# Altium PCB PCB2.PcbDoc
Units mm, origin at the board's own origin, x right, y up, seen from the top; angles counter-clockwise.
Board outline 87 x 60 mm, 4 copper layers (Top Layer, Internal Plane 1, Internal Plane 2, Bottom Layer), stack 0.462 mm thick; 43 components, 44 nets, 197 pads, 39 vias.
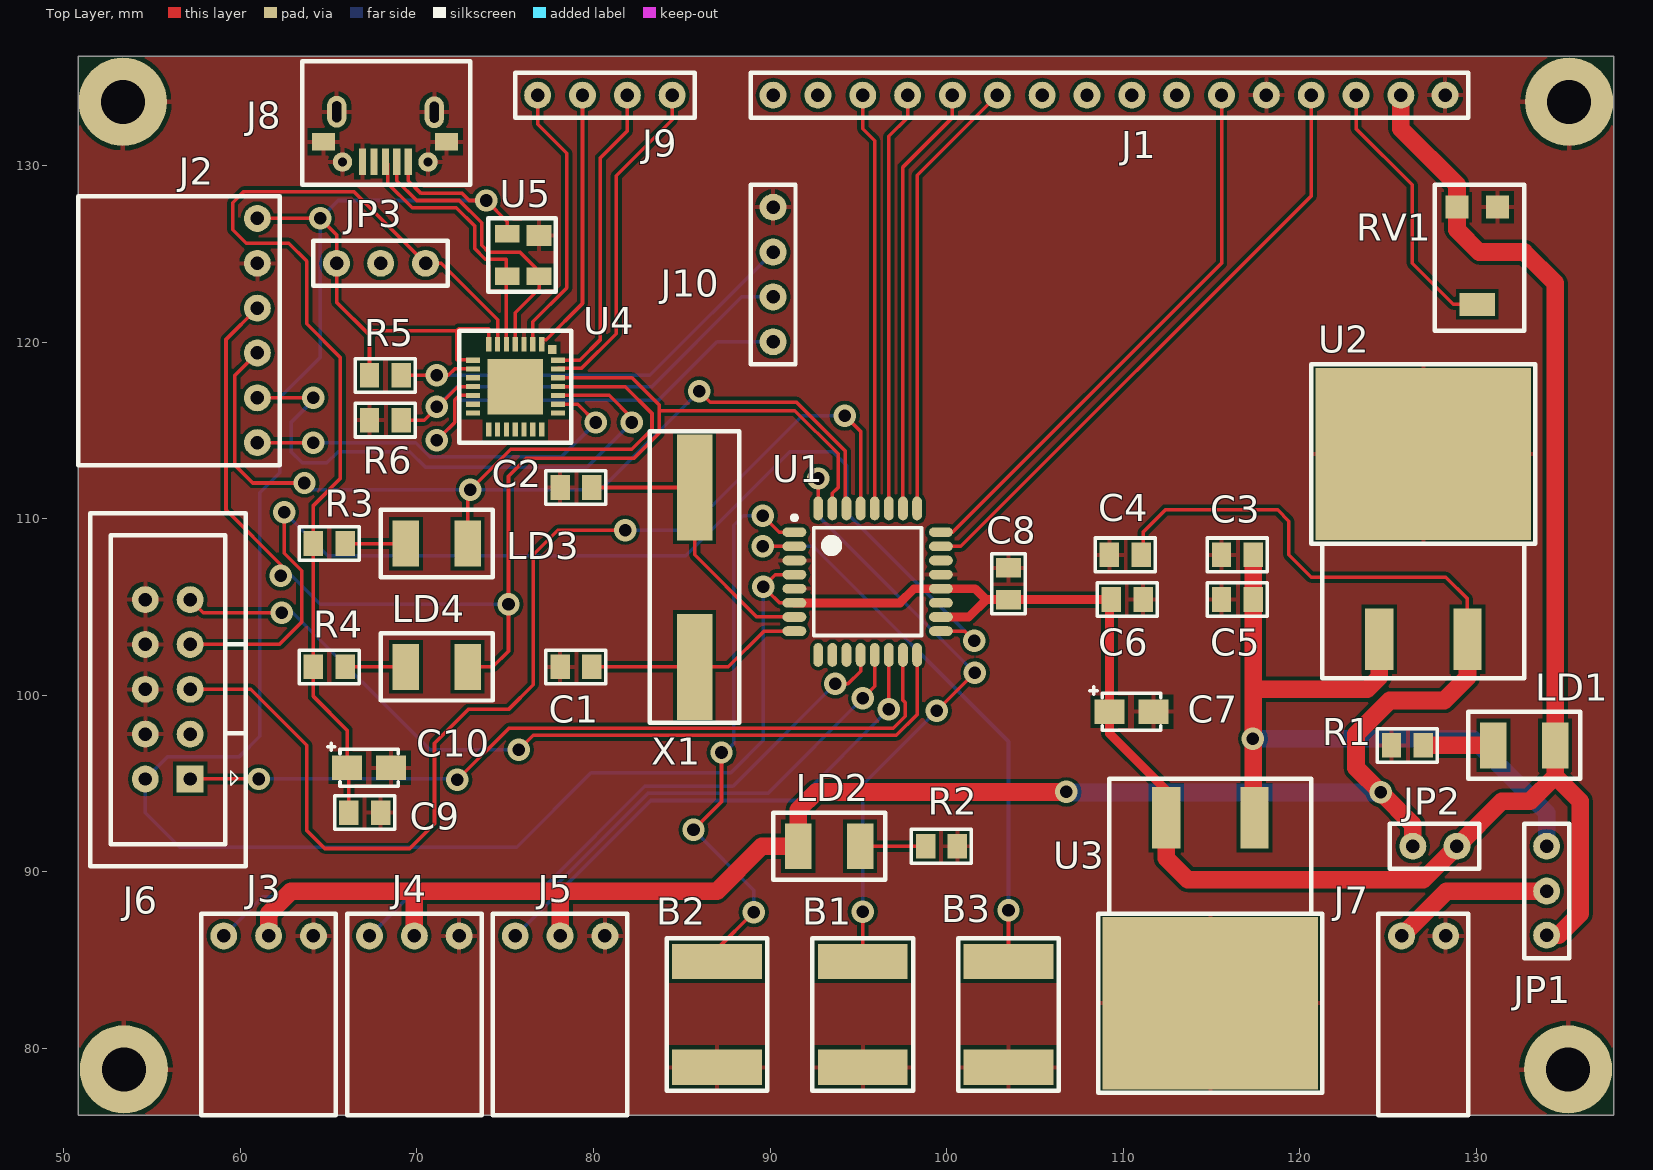
[diagram p0: Top Layer view]
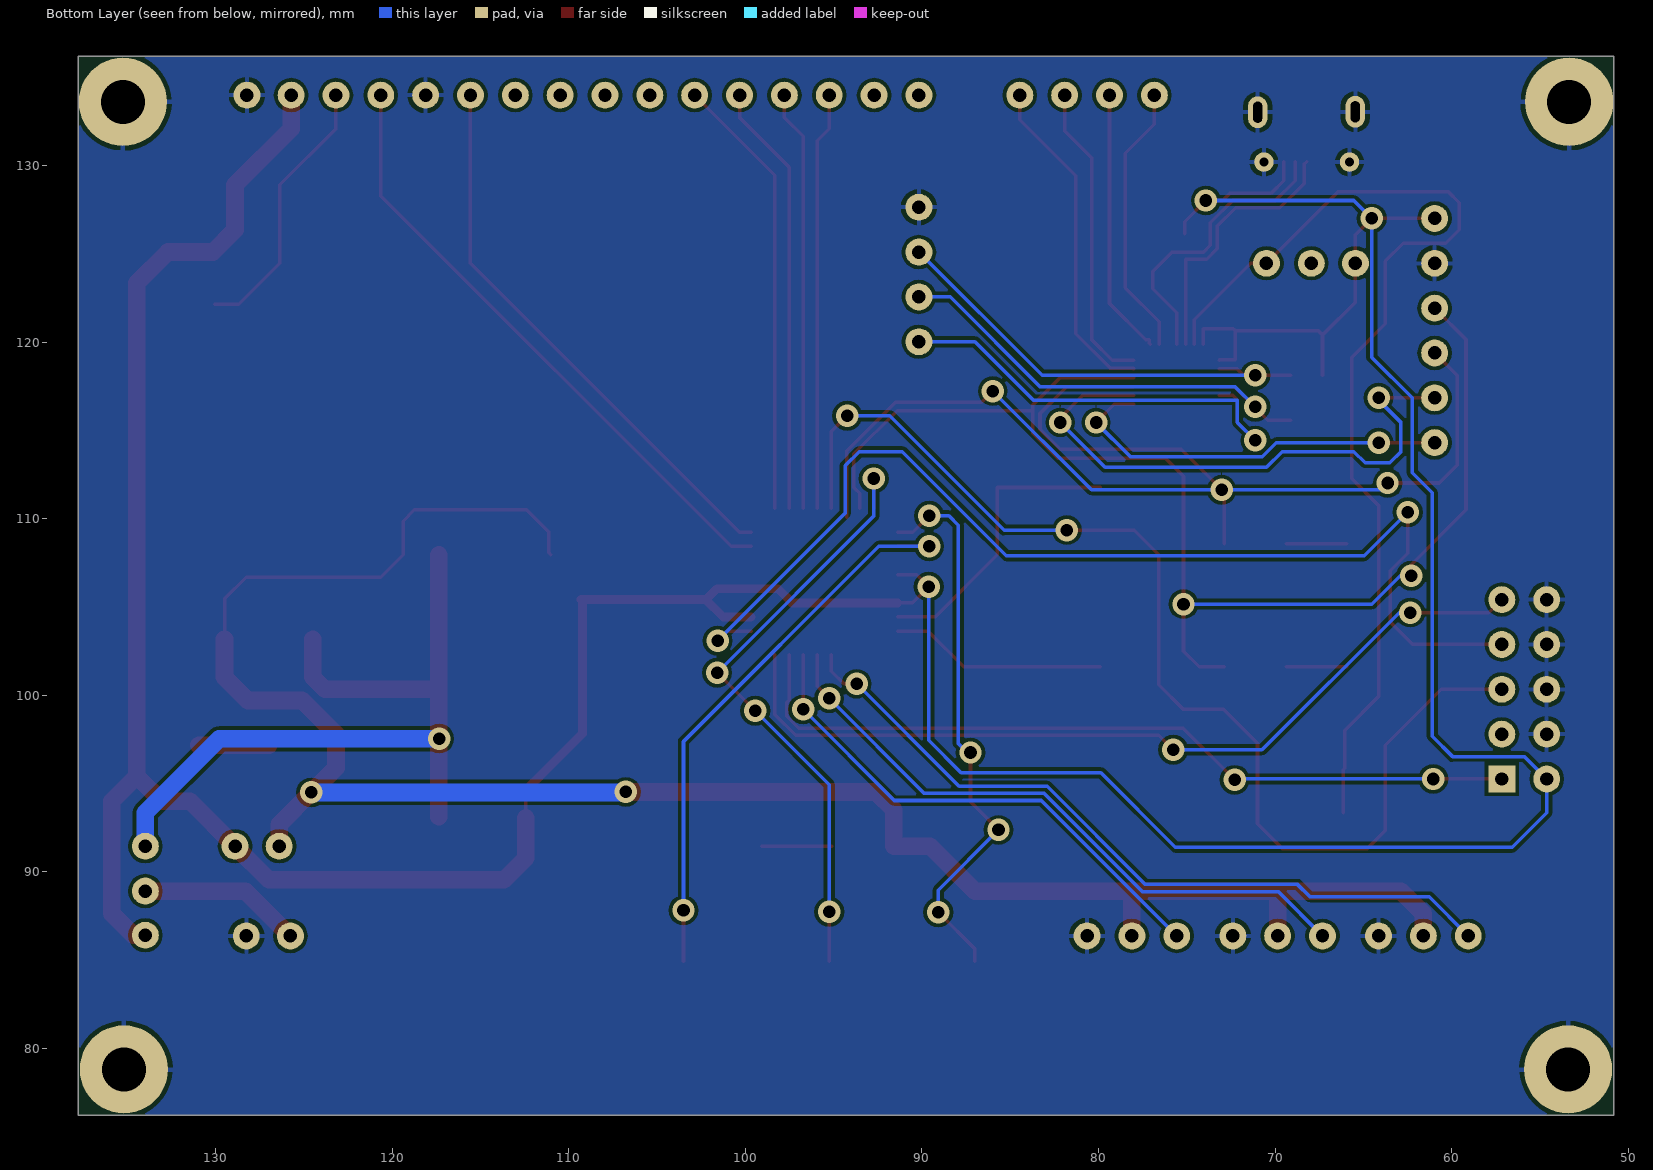
[diagram p1: Bottom Layer view, seen from below]
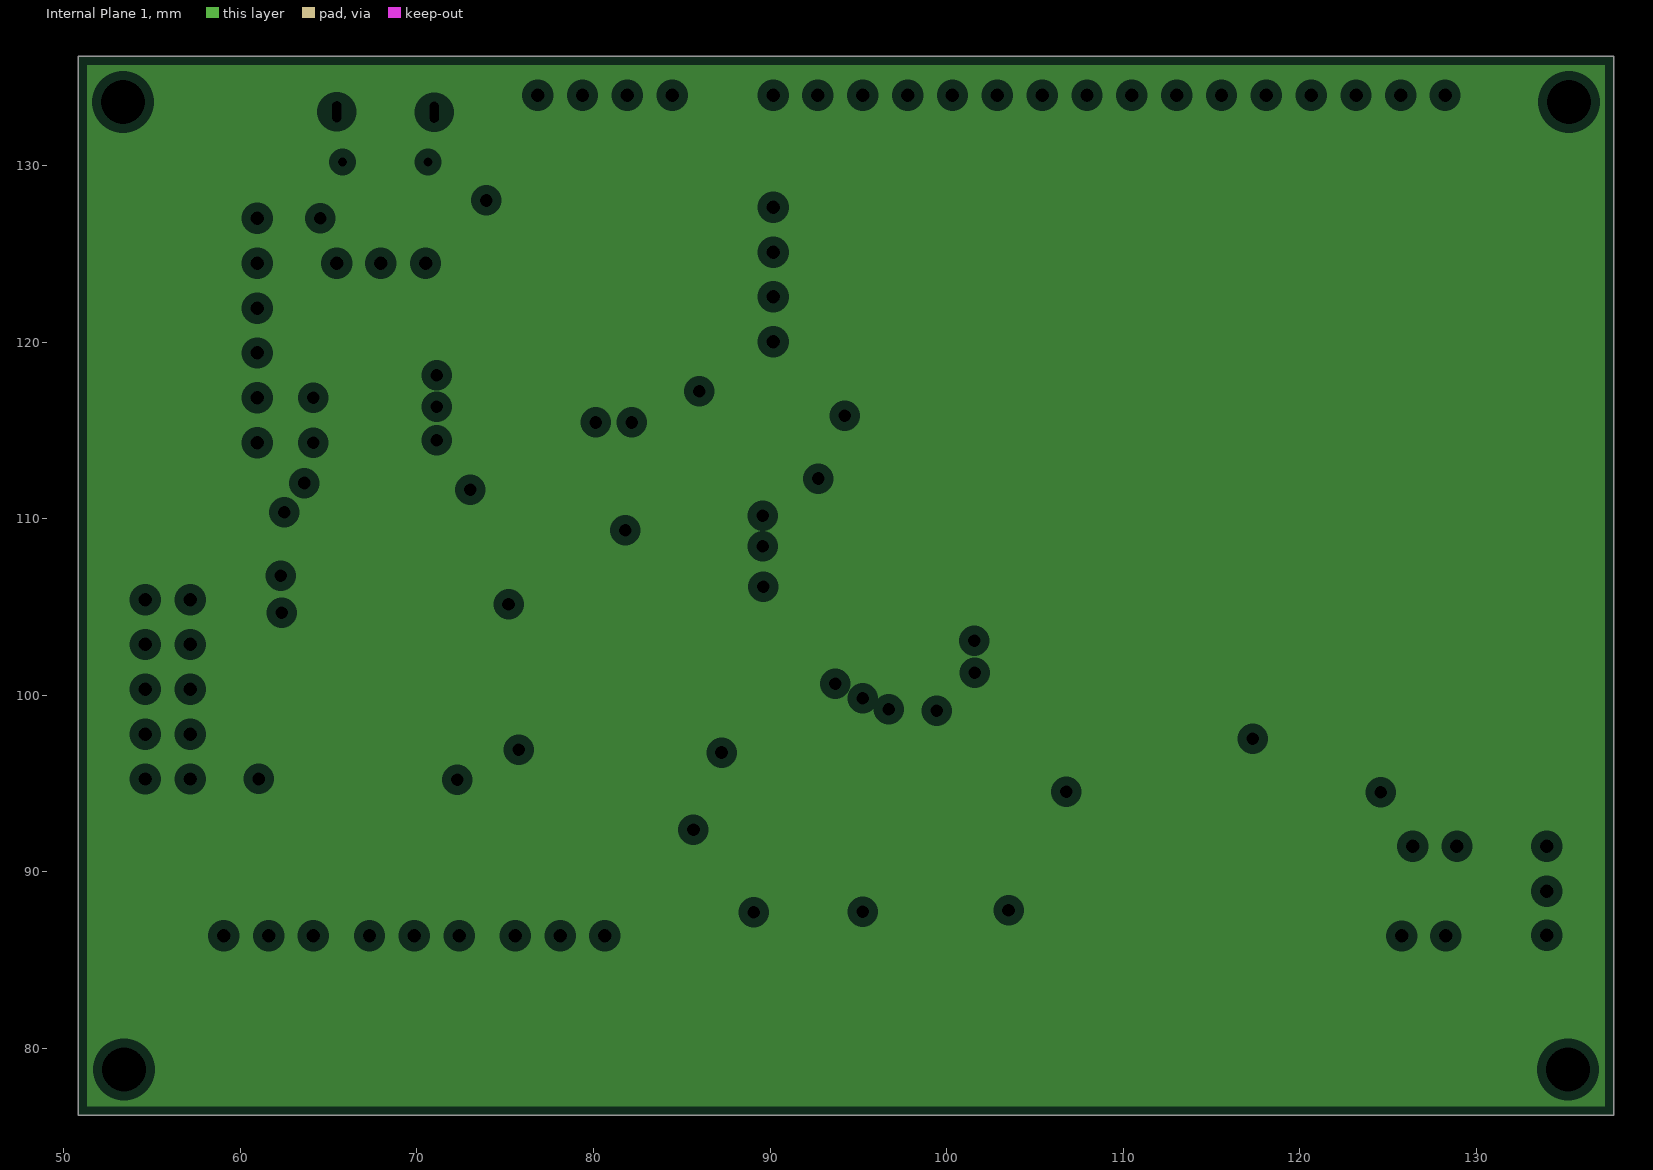
[diagram p2: Internal Plane 1, clearances drawn from the general rule]
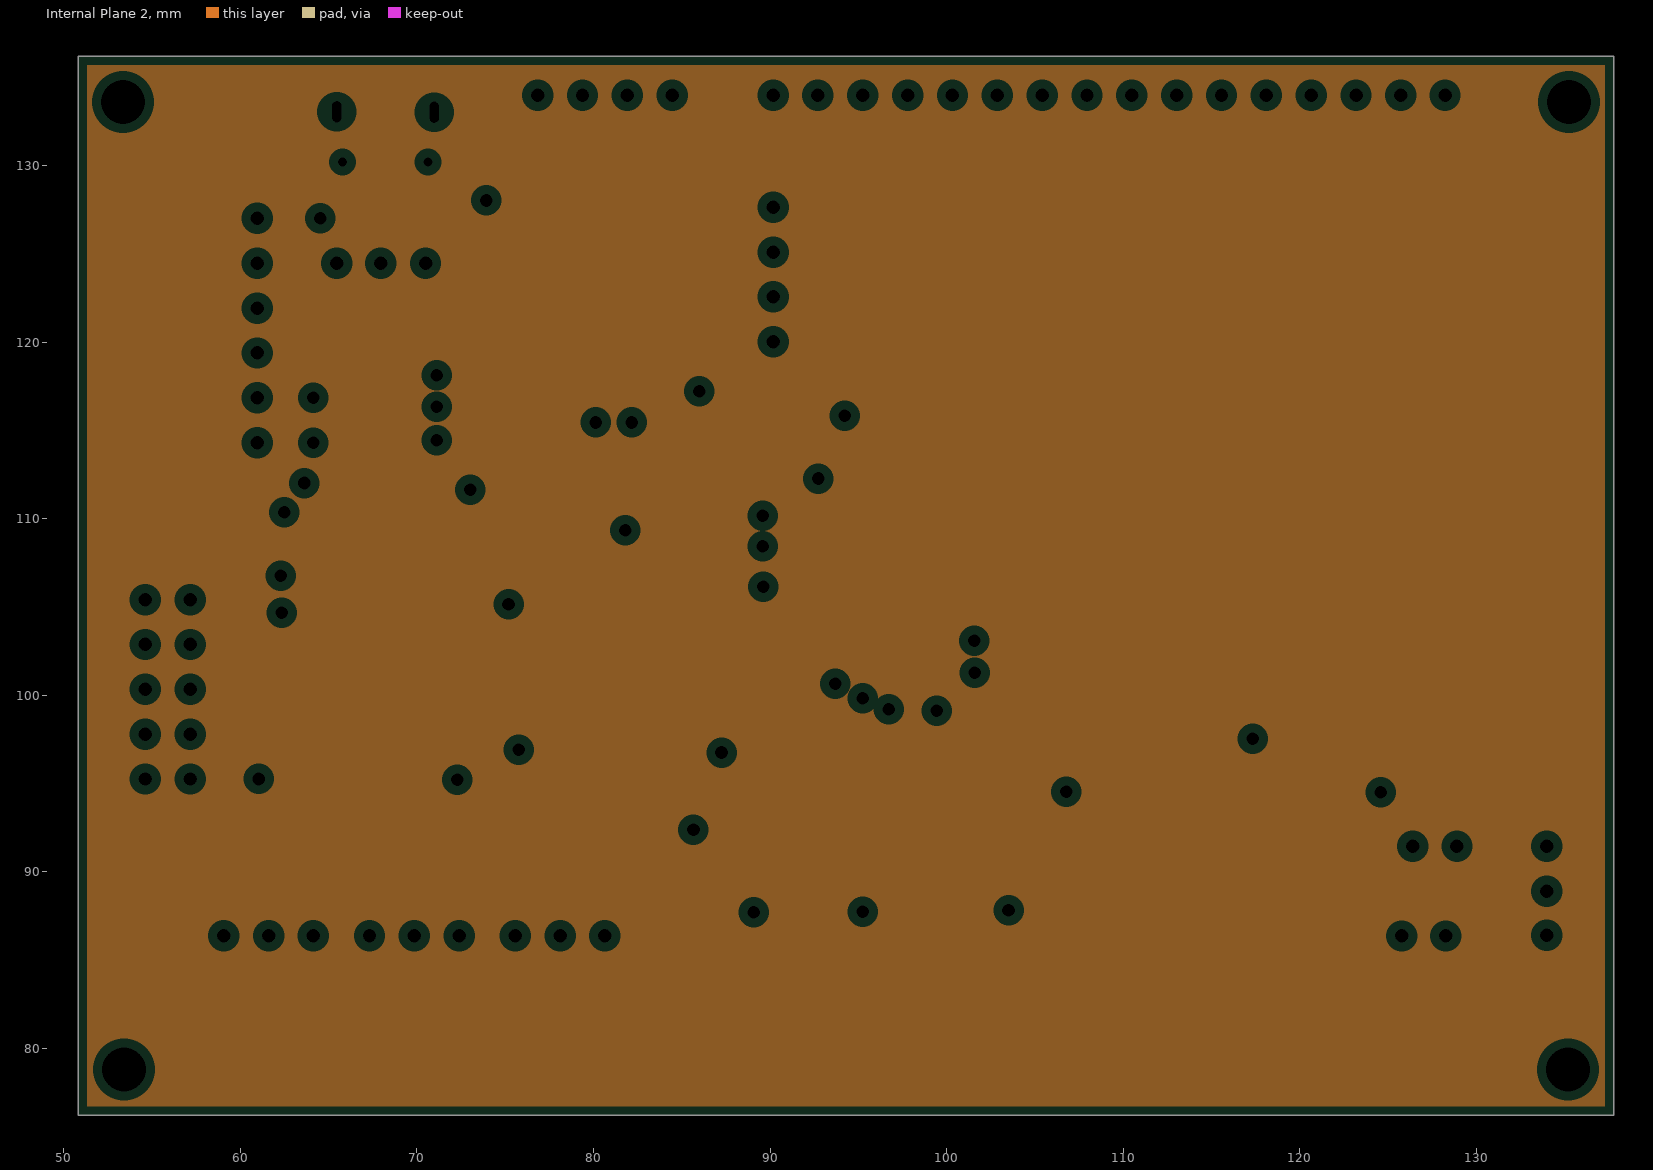
[diagram p3: Internal Plane 2, clearances drawn from the general rule]

## Layer stack, top to bottom
Top Solder: solder mask 0.0102, Solder Resist, Dk 3.5
Top Layer: signal copper 0.0356
Internal Plane 1: plane copper 0.0356
Internal Plane 2: plane copper 0.0356
Dielectric 1: dielectric 0.32, FR-4, Dk 4.8
Bottom Layer: signal copper 0.0356
Bottom Solder: solder mask 0.0102, Solder Resist, Dk 3.5

## Board outline
50.8,76.2 137.8,76.2 137.8,136.2 50.8,136.2

## Design rules (kind name [scope] priority, off if disabled: settings)
Clearance [All] p1: gap=0.2
PlaneClearance [All] p1: clearance=0.508
PlaneConnect [All] p1: planeconnectstyle=Relief reliefexpansion=0.508 reliefentries=4 reliefconductorwidth=0.254 reliefairgap=0.254
PolygonConnect [All] p1: connectstyle=Relief reliefconductorwidth=0.254 reliefentries=4 polygonreliefangle="90 Angle" airgapwidth=0.254
RoutingVias [All] p1: holewidth=0.5 width=1 viastyle="Through Hole" minholewidth=0.711 minwidth=1.27 maxholewidth=0.711 maxwidth=1.27
SolderMaskExpansion [All] p1: expansion=0.102
Width [All] p1: maxlimit=2 minlimit=0.2 preferedwidth=0.2
28 further rules are at their usual default settings.

## Components (designator, comment, footprint, x,y, rotation, side; value= is the part's Value field where it differs from the comment)
B1 "Button" "Button 5x5" 95.25,81.915 r270 top
B2 "Выбор формата выводимых данных" "Button 5x5" 86.995,81.915 r90 top
B3 "Сохранение позиции курса" "Button 5x5" 103.505,81.915 r90 top
C1 "С0805" 0805 78.105,101.6 r0 top
C2 "С0805" 0805 78.105,111.76 r0 top
C3 "С0805" 0805 115.57,107.95 r0 top
C4 "С0805" 0805 109.22,107.95 r0 top
C5 "С0805" 0805 115.57,105.41 r0 top
C6 "С0805" 0805 111.125,105.41 r180 top
C7 "С3/4" A 109.22,99.06 r0 top
C8 "С0805" 0805 103.505,105.41 r90 top
C9 "С0805" 0805 67.945,93.345 r180 top
C10 "С3/4" A 66.04,95.885 r0 top
J1 "LCD" LCD 128.27,133.985 r180 top
J2 "MG-10-222" "DS1022 1x6" 60.96,127 r270 top
J3 "Servo" "DS1022 1x3" 59.055,86.36 r0 top
J4 "Servo" "DS1022 1x3" 67.31,86.36 r0 top
J5 "Servo" "DS1022 1x3" 75.565,86.36 r0 top
J6 "Вилка ВН-10" "Вилка ВН-10" 57.15,95.25 r90 top
J7 "Input power" "Input power" 128.27,86.36 r0 top
J8 "USB" micro-USB 65.405,129.54 r90 top
J9 "Other header" "Other header" 76.835,133.985 r0 top
J10 "Other header 2" "Other header" 90.17,127.635 r270 top
JP1 "Jumper 3" "JUMPER 3" 133.985,88.9 r90 top
JP2 "Jumper" Jumper 128.905,91.44 r180 top
JP3 "Jumper 3" "JUMPER 3" 67.945,124.46 r0 top
LD1 "LED" LED 132.715,97.155 r180 top
LD2 "LED" LED 93.345,91.44 r0 top
LD3 "RX_LED" LED 71.12,108.585 r0 top
LD4 "TX_LED" LED 71.12,101.6 r0 top
R1 "R0805" 0805 127,97.155 r180 top
R2 "R0805" 0805 98.806,91.44 r0 top
R3 "R0805" 0805 64.135,108.585 r0 top
R4 "R0805" 0805 64.135,101.6 r0 top
R5 "R0805" 0805 67.31,118.11 r0 top
R6 "R0805" 0805 67.31,115.57 r0 top
RV1 "POT" POT 128.905,127.635 r0 top
U1 "ATmega8" ATmega8 91.44,109.22 r0 top
U2 "7805 SMD" "7805 SMD" 127,113.665 r0 top
U3 "7805 SMD" "7805 SMD" 114.935,82.55 r180 top
U4 "CP2102" CP2102 75.565,117.475 r0 top
U5 "SP0503B" SP0503B 77.216,125.73 r270 top
X1 "XTAL" HC-49SM 85.725,111.76 r270 top

## Footprints (in the part's own frame and the unit in brackets; to place one, negate y for a bottom-side part, rotate by r counter-clockwise, add the part's x,y. Pads: shape width x height; smd on the part's side, far side on the other; paste and mask are expansions set on the pad)
0805 [mm]
  rect 1.1x1.4 smd: 1(0,0) 2(1.8,0)
  silkscreen extent -0.8,-0.95 2.6,0.95, body extent -0.4,-0.68 2.2,0.68, height 0.9
"7805 SMD" [mm]
  rect 1.6x3.5 smd: 1(-2.5,-10.5) 3(2.5,-10.5)
  rect 12.2x9.75 smd: 2(0,0)
  silkscreen extent -6.35,-12.7 6.35,5.08, body extent -5.28,-11.65 5.36,4.2, height 4.8
A [mm]
  rect 1.7x1.4 smd: 1(0,0) 2(2.5,0)
  silkscreen extent -1.1,-1.05 2.9,1.4, body extent -0.47,-0.82 2.92,0.77, height 1.6
ATmega8 [mm]
  oval 1.35x0.55 smd: 1(-0.063,0.006) 2(-0.063,-0.794) 3(-0.063,-1.594) 4(-0.063,-2.394) 5(-0.063,-3.194) 6(-0.063,-3.994) 7(-0.063,-4.794) 8(-0.063,-5.594) 17(8.237,-5.594) 18(8.237,-4.794) 19(8.237,-3.994) 20(8.237,-3.194) 21(8.237,-2.394) 22(8.237,-1.594) 23(8.237,-0.794) 24(8.237,0.006)
  oval 0.55x1.35 smd: 9(1.287,-6.944) 10(2.087,-6.944) 11(2.887,-6.944) 12(3.687,-6.944) 13(4.487,-6.944) 14(5.287,-6.944) 15(6.087,-6.944) 16(6.887,-6.944) 25(6.887,1.356) 26(6.087,1.356) 27(5.287,1.356) 28(4.487,1.356) 29(3.687,1.356) 30(2.887,1.356) 31(2.087,1.356) 32(1.287,1.356)
  silkscreen extent -0.19,-5.84 7.14,0.96, body extent -0.41,-7.29 8.59,1.71, height 1.08
"Button 5x5" [mm]
  rect 2x5.08 smd: 1(-3,0) 2(3,0)
  silkscreen extent -4.33,-2.85 4.33,2.85, body extent -3.25,-2.54 3.25,2.54, height 1.52
CP2102 [mm] "QFN-28"
  rect 0.5x0.5 smd: 0(2.1,2.1)
  rect 0.3x0.8 smd: 1(1.5,2.4) 2(1,2.4) 3(0.5,2.4) 4(0,2.4) 5(-0.5,2.4) 6(-1,2.4) 7(-1.5,2.4) 15(-1.5,-2.425) 16(-1,-2.425) 17(-0.5,-2.425) 18(0,-2.425) 19(0.5,-2.425) 20(1,-2.425) 21(1.5,-2.425)
  rect 0.8x0.3 smd: 8(-2.4,1.5) 9(-2.4,1) 10(-2.4,0.5) 11(-2.4,0) 12(-2.4,-0.5) 13(-2.4,-1) 14(-2.4,-1.5) 22(2.425,-1.5) 23(2.425,-1) 24(2.425,-0.5) 25(2.425,0) 26(2.425,0.5) 27(2.425,1) 28(2.425,1.5)
  rect 3.15x3.15 smd: 29(0,0)
  silkscreen extent -3.17,-3.17 3.17,3.17, body extent -2.5,-2.5 2.5,2.5, height 1.05
"DS1022 1x3" [mil]
  round 60 hole 30: 1(0,0) 2(100,0) 3(200,0)
  silkscreen extent -50,-400 250,50, body extent -50,-395 250,13, height 98
"DS1022 1x6" [mil]
  round 60 hole 30: 1(0,0) 2(100,0) 3(200,0) 4(300,0) 5(400,0) 6(500,0)
  silkscreen extent -50,-400 550,50, body extent -50,-397 550,11, height 98
HC-49SM [mm]
  rect 6x2 smd: 1(0,0) 2(10.16,0)
  silkscreen extent -3.18,-2.54 13.33,2.54, body extent -1.62,-2.4 11.78,2.4, height 4
"Input power" [mil]
  round 60 hole 30: 1(-98.49,-0.07) 2(-0.06,-0.07)
  silkscreen extent -150,-400 50,50, body extent -150,-395 50,13, height 98
Jumper [mil]
  round 60 hole 30: 1(0,0) 2(98.43,0)
  silkscreen extent -50,-50 150,50, body extent -50,-50 150,50, height 339
"JUMPER 3" [mil]
  round 60 hole 30: 1(-98.43,0) 2(0,0) 3(100,0)
  silkscreen extent -150,-50 150,50, body extent -150,-50 150,50, height 339
LCD [mil]
  round 60 hole 30: 1(1.57,0) 2(100,0) 3(200,0) 4(300,0) 5(400,0) 6(500,0) 7(600,0) 8(700,0) 9(800,0) 10(900,0) 11(1000,0) 12(1100,0) 13(1200,0) 14(1300,0) 15(1400,0) 16(1500,0)
  silkscreen extent -50,-50 1550,50, body extent -50,-50 1550,50, height 339
LED [mm]
  rect 1.5x2.6 smd: 1(-1.75,0) 2(1.75,0)
  silkscreen extent -3.18,-1.91 3.18,1.91, body extent -1.75,-1.4 1.75,1.4, height 0.95
micro-USB [mm]
  rect 1.5x0.4 smd: 1(0.675,-4.1) 2(0.675,-3.45) 3(0.675,-2.8) 4(0.675,-2.15) 5(0.675,-1.5)
  oval 1.8x1.1 hole 0.5 slot 1.2 at 0 deg unplated: 6(3.5,-0.05) 9(3.475,-5.575)
  round 1.1 hole 0.5: 7(0.65,-0.375) 8(0.65,-5.225)
  rect 1x1.3 smd: 10(1.8,0.7) 10(1.8,-6.275)
  silkscreen extent -0.64,-7.62 6.35,1.91, body extent 0.48,-6.69 6.32,1.09, height 2.72
"Other header" [mil]
  round 60 hole 30: 1(0,0) 2(100,0) 3(200,0) 4(300,0)
  silkscreen extent -50,-50 350,50, body extent -50,-50 350,50, height 339
POT [mm]
  rect 1.3x1.3 smd: 1(0,0) 3(2.3,0)
  rect 2x1.3 smd: 2(1.15,-5.5)
  silkscreen extent -1.27,-6.98 3.81,1.27
SP0503B [mm] "TO-253"
  rect 1.2x1.4 smd: 1(-0.3,-0.3)
  rect 1x1.4 smd: 2(-0.4,-2.1) 3(2,-2.1) 4(2,-0.3)
  silkscreen extent -1.27,-3.18 2.88,0.64, body extent -0.5,-2.65 2.1,0.35, height 1.2
"Вилка ВН-10" [mil]
  rect 60x60 hole 30: 1(0,0)
  round 60 hole 30: 2(0,100) 3(100,0) 4(100,100) 5(200,0) 6(200,100) 7(300,0) 8(300,100) 9(400,0) 10(400,100)
  silkscreen extent -195,-124 593,222, body extent -202,-127 600,235, height 348

## Part data
B2 B3: library part Button
LD3 LD4: library part LED
U5: "TO-253"

## Free pads (board coordinates)
  round 5 hole 2.5: 0(135.2,78.8) 1(53.4,78.8) 2(53.34,133.604) 3(135.255,133.604)

## Via types
v1: diameter 1.27, hole 0.711, Top Layer to Bottom Layer, 39 vias

## Nets (pads, with @x,y where several pads share a name; then routed paths per layer and width w, separated by ;. In a path a pad name is that pad's centre, name@x,y a point inside that pad or via, vN(x,y) a via of type N, cw(c..) or ccw(c..) an arc to the next point about the centre after c; other vN are vias at no path point)
3V3: C9.2 C10.1 JP3.3 R3.1 R4.1 U4.6 | length 59.6
  Top Layer w0.2: C9.2 66.145,95.78 C10.1 66.04,98.019 64.135,99.924 R4.1 R3.1 64.135,110.744 65.659,112.268 65.659,119.126 63.754,121.031 63.754,124.587 62.738,125.603 60.325,125.603 59.563,126.365 59.563,127.889 60.198,128.524 66.421,128.524 JP3.3 71.374,124.46 74.565,121.269 U4.6
!SUSPEND: J10.3 R6.2 U4.11 | length 26.5
  Top Layer w0.2: R6.2 70.409,115.57 72.314,117.475 U4.11
  Bottom Layer w0.2: v1(71.12,116.332) 72.263,117.475 83.312,117.475 88.392,122.555 J10.3
CTS: J2.6 U4.23 | length 22.9
  Top Layer w0.2: J2.6 v1(64.135,114.3) ; U4.23 79.105,116.475 v1(80.137,115.443)
  Bottom Layer w0.2: v1(64.135,114.3) 69.925,114.3 70.733,113.492 78.186,113.492 v1(80.137,115.443)
DB4: J1.11 U1.25 | length 25.3
  Top Layer w0.2: U1.25 98.327,129.442 J1.11
DB5: J1.12 U1.26 | length 24.6
  Top Layer w0.2: U1.26 97.527,129.912 100.33,132.715 J1.12
DB6: J1.13 U1.27 | length 23.8
  Top Layer w0.2: U1.27 96.727,131.652 97.79,132.715 J1.13
DB7: J1.14 U1.28 | length 23.7
  Top Layer w0.2: J1.14 95.25,132.08 95.927,131.403 U1.28
DCD: J9.2 U4.1 | length 15.2
  Top Layer w0.2: U4.1 77.115,119.925 77.115,120.125 77.315,120.125 79.375,122.185 J9.2
DSR: J9.4 U4.27 | length 18.9
  Top Layer w0.2: U4.27 78.04,118.525 79.34,118.525 81.28,120.465 81.28,129.413 84.455,132.588 J9.4
DTR: J9.3 U4.28 | length 17.4
  Top Layer w0.2: U4.28 79.224,118.975 80.391,120.142 80.391,130.429 81.915,131.953 J9.3
E: J1.6 U1.24 | length 31.7
  Top Layer w0.2: U1.24 100.336,109.226 115.57,124.46 J1.6
GND: B1.2 B2.1 B3.1 C1.1 C2.1 C3.1 C4.1 C5.1 C6.1 C7.2 C8.2 C9.1 C10.2 J1.1 J1.5 J2.2 J3.3 J4.3 J5.3 J6.4 J6.6 J6.8 J6.10 J7.2 J8.5 J8.6 J8.7 J8.8 J8.9 J8.10 J10.1 pad.0 pad.1 pad.2 pad.3 R1.2 R2.2 R6.1 RV1.3 U1.3 U1.5 U1.21 U2.2 U3.2 U4.3 U5.1
MISO: J6.9 U1.16 | length 48.9
  Top Layer w0.2: J6.9 57.887,104.673 v1(62.332,104.673) ; v1(75.768,96.901) 76.587,97.72 97.144,97.72 98.327,98.903 U1.16
  Bottom Layer w0.2: v1(62.332,104.673) 62.967,104.673 70.739,96.901 v1(75.768,96.901)
MOSI: J6.1 U1.15 | length 45.6
  Top Layer w0.2: J6.1 v1(61.036,95.25) ; v1(72.288,95.199) 75.209,98.12 96.979,98.12 97.662,98.804 97.662,99.578 97.527,99.713 U1.15
  Bottom Layer w0.2: v1(61.036,95.25) 72.238,95.25 v1(72.288,95.199)
NetB1_1: B1.1 U1.32 | length 35.4
  Top Layer w0.2: U1.32 v1(92.727,112.268) ; B1.1 v1(95.25,87.732) ; v1(99.441,99.111) v1(101.6,101.27)
  Bottom Layer w0.2: v1(92.727,112.268) 92.727,110.143 v1(101.6,101.27) ; v1(95.25,87.732) 95.25,94.92 v1(99.441,99.111)
NetB2_2: B2.2 U1.1 | length 32.1
  Top Layer w0.2: v1(85.661,92.367) 87.249,93.955 v1(87.249,96.749) ; B2.2 86.995,85.623 v1(89.078,87.706) ; v1(89.586,110.16) 90.52,109.226 U1.1
  Bottom Layer w0.2: v1(85.661,92.367) 89.078,88.951 v1(89.078,87.706) ; v1(87.249,96.749) 87.427,96.749 87.935,97.257 87.935,109.626 88.468,110.16 v1(89.586,110.16)
NetB3_2: B3.2 U1.2 | length 32.7
  Top Layer w0.2: v1(89.592,108.426) U1.2 ; B3.2 v1(103.505,87.808)
  Bottom Layer w0.2: v1(89.592,108.426) 92.449,108.426 103.505,97.37 v1(103.505,87.808)
NetC1_2: C1.2 U1.8 X1.2 | length 12.3
  Top Layer w0.2: C1.2 X1.2 87.63,101.6 89.656,103.626 U1.8
NetC2_2: C2.2 U1.7 X1.1 | length 16.7
  Top Layer w0.2: C2.2 X1.1 85.725,107.95 89.249,104.426 U1.7
NetC3_2: C3.2 C5.2 JP1.3 U2.1 U3.1 | length 44.7
  Top Layer w1: U3.1@117.37,93.115 117.37,100.33 ; C3.2 C5.2 117.37,100.33 ; U2.1 124.5,101.005 123.825,100.33 117.37,100.33
  Bottom Layer w1: v1(117.348,97.536) 129.794,97.536 133.985,93.345 JP1.3
NetJ1_3: J1.3 RV1.2 | length 15.5
  Top Layer w0.2: J1.3 123.19,132.08 126.365,128.905 126.365,124.46 128.69,122.135 RV1.2
NetJ7_1: J7.1 JP1.2 | length 9.3
  Top Layer w1: J7.1 128.31,88.9 JP1.2
NetJ8_2: J8.2 U4.4 U5.4 | length 16.7
  Top Layer w0.2: J8.2 68.855,129.138 69.977,128.016 72.39,128.016 73.66,126.746 73.66,125.476 74.041,125.095 75.819,125.095 76.916,123.998 U5.4 76.916,123.017 75.565,121.666 U4.4
NetJ8_3: J8.3 U4.5 U5.3 | length 15.3
  Top Layer w0.2: J8.3 68.355,130.065 68.355,128.974 69.722,127.606 72.234,127.606 73.26,126.58 73.26,125.31 73.875,124.695 75.065,124.695 U4.5
NetLD1_2: LD1.2 R1.1 | length 4
  Top Layer w1: R1.1 LD1.2
NetLD2_2: LD2.2 R2.1 | length 4
  Top Layer w0.2: LD2.2 R2.1@99.06,91.44
NetLD3_1: LD3.1 R3.2 | length 3.4
  Top Layer w0.2: R3.2 LD3.1
NetLD4_1: LD4.1 R4.2 | length 3.4
  Top Layer w0.2: R4.2 LD4.1
PWM1: J3.1 U1.12 | length 43.2
  Top Layer w0.2: v1(93.701,100.635) 94.412,100.635 95.127,101.35 U1.12
  Bottom Layer w0.2: J3.1 61.265,88.57 68.018,88.57 68.723,89.275 77.348,89.275 82.904,94.831 87.897,94.831 v1(93.701,100.635)
PWM2: J4.1 U1.13 | length 36.3
  Top Layer w0.2: v1(95.25,99.822) 95.927,100.499 U1.13
  Bottom Layer w0.2: J4.1 69.825,88.875 77.514,88.875 83.07,94.431 89.859,94.431 v1(95.25,99.822)
PWM3: J5.1 U1.14 | length 29.6
  Top Layer w0.2: v1(96.727,99.191) U1.14
  Bottom Layer w0.2: J5.1 83.236,94.031 91.567,94.031 v1(96.727,99.191)
RES: J6.5 U1.29 | length 66.4
  Top Layer w0.2: J6.5 60.579,100.33 63.754,97.155 63.754,92.329 64.77,91.313 69.596,91.313 70.993,92.71 70.993,97.282 72.898,99.187 75.184,99.187 76.581,100.584 76.581,107.95 77.978,109.347 v1(81.788,109.347) ; v1(94.234,115.824) 95.127,114.931 U1.29
  Bottom Layer w0.2: v1(81.788,109.347) 85.344,109.347 91.821,115.824 v1(94.234,115.824)
RESET: 
RI: J9.1 U4.2 | length 15.6
  Top Layer w0.2: U4.2 76.565,121.142 78.486,123.063 78.486,130.683 76.835,132.334 J9.1
RS: J1.4 U1.23 | length 34.9
  Top Layer w0.2: U1.23 100.806,108.426 120.65,128.27 J1.4
RST: J10.2 R5.2 U4.9 | length 26.1
  Top Layer w0.2: R5.2 v1(71.12,118.11) 71.78,118.11 72.145,118.475 U4.9
  Bottom Layer w0.2: v1(71.12,118.11) 83.185,118.11 J10.2
RTS: J2.5 U4.24 | length 33
  Top Layer w0.2: J2.5 v1(64.135,116.84) ; U4.24 80.891,116.975 82.169,115.697 v1(82.169,115.443)
  Bottom Layer w0.2: v1(64.135,116.84) 64.135,116.713 62.865,115.443 62.865,113.792 63.5,113.157 64.897,113.157 65.532,113.792 69.596,113.792 70.485,112.903 79.629,112.903 v1(82.169,115.443)
RXD: J2.4 LD3.2 U1.30 U4.25 | length 71.2
  Top Layer w0.2: J2.4 59.69,118.11 59.69,113.03 60.706,112.014 v1(63.627,112.014) ; LD3.2 72.87,111.478 v1(73.025,111.633) 75.311,113.919 82.169,113.919 83.312,115.062 83.312,115.951 81.788,117.475 U4.25 ; v1(85.979,117.221) 86.614,116.586 91.498,116.586 94.253,113.831 U1.30@94.253,110.65 ; U1.30@94.253,110.089 U1.30@94.253,110.65 ; U1.30 U1.30@94.253,110.65
  Bottom Layer w0.2: v1(63.627,112.014) 64.008,111.633 v1(73.025,111.633) 80.391,111.633 v1(85.979,117.221)
SCK: J6.7 U1.17 | length 64.2
  Top Layer w0.2: J6.7 62.205,102.87 63.475,104.14 63.475,107.036 62.484,108.026 v1(62.484,110.363) ; U1.17 101.022,103.626 v1(101.575,103.073)
  Bottom Layer w0.2: v1(62.484,110.363) 64.948,107.899 85.217,107.899 91.11,113.792 93.548,113.792 94.336,113.005 94.336,110.312 v1(101.575,103.073)
SUSPEND: J10.4 U4.12 | length 25.6
  Top Layer w0.2: v1@71.374,114.681 72.136,115.443 72.136,116.713 72.398,116.975 U4.12
  Bottom Layer w0.2: v1(71.12,114.427) 72.136,115.443 72.136,116.713 83.693,116.713 86.995,120.015 J10.4
TXD: J2.3 LD4.2 U1.31 U4.26 | length 75.2
  Top Layer w0.2: J2.3 59.182,120.142 59.182,110.49 62.281,107.391 v1(62.281,106.756) ; LD4.2 74.295,101.6 75.184,102.489 v1(75.184,105.156) 75.184,112.395 76.2,113.411 82.296,113.411 83.712,114.827 83.712,116.117 ; U4.26 82.177,117.975 83.712,116.44 83.712,116.117 ; U1.31 93.527,111.434 93.853,111.76 93.853,113.665 91.401,116.117 83.712,116.117
  Bottom Layer w0.2: v1(62.281,106.756) 62.916,106.756 64.516,105.156 v1(75.184,105.156)
VCCIO: JP3.2
VS: C4.2 J3.2 J4.2 J5.2 JP2.2 LD2.1 U2.3 | length 116.6
  Top Layer w0.2: C4.2 111.125,108.055 111.125,109.22 112.395,110.49 118.745,110.49 119.38,109.855 119.38,107.95 120.65,106.68 128.27,106.68 129.5,105.45 U2.3
  Top Layer w1: J3.2 61.595,87.63 62.865,88.9 69.85,88.9 ; J4.2 69.85,88.9 ; J5.2 78.105,88.9 ; v1(106.779,94.516) 92.611,94.516 91.595,93.5 LD2.1 89.535,91.44 86.995,88.9 78.105,88.9 ; JP2.2 126.405,92.67 v1(124.587,94.488) 123.19,95.885 123.19,97.79 125.095,99.695 128.19,99.695 129.5,101.005 U2.3 ; 69.85,88.9 78.105,88.9
  Bottom Layer w1: v1@106.779,94.488 v1(124.587,94.488)
VSS: C6.2 C7.1 C8.1 J1.2 J2.1 J6.2 J8.1 JP1.1 JP2.1 JP3.1 LD1.1 R5.1 RV1.1 U1.4 U1.6 U1.18 U1.20 U3.3 U4.7 U4.8 U5.2 | length 250.2
  Top Layer w0.2: J2.1 v1(64.516,127) 65.445,126.071 JP3.1 65.445,122.261 67.31,120.396 ; R5.1 67.31,120.396 ; J8.1 69.505,129.142 70.231,128.416 72.556,128.416 72.956,128.016 v1(73.914,128.016) 75.116,126.814 U5.2 ; U4.8 73.141,118.999 72.263,118.999 72.263,120.65 ; U4.7 74.065,120.753 72.366,120.753 72.263,120.65 ; U1.6 90.532,105.226 89.84,105.918 89.84,106.375 90.291,106.826 U1.4 ; C6.2@109.22,105.305 C6.2 ; U3.3 U3.3@112.435,94.615 ; JP1.1 JP1.1@134.66,86.4 ; 67.31,120.396 67.564,120.65 72.263,120.65
  Top Layer w0.5: U1.6 97.352,105.226 98.152,106.026 U1.20 101.619,106.026 102.235,105.41 ; U1.18 101.251,104.426 102.235,105.41 ; C6.2@109.22,105.305 C7.1 109.22,97.83 U3.3@112.435,94.615 ; C6.2 C8.1 102.235,105.41
  Top Layer w1: U3.3 112.435,90.765 113.665,89.535 127,89.535 JP2.1 131.445,93.98 133.04,93.98 134.465,95.405 ; J1.2 125.73,132.08 128.905,128.905 RV1.1 128.905,126.365 130.175,125.095 132.715,125.095 134.465,123.345 LD1.1 134.465,95.405 ; JP1.1@134.66,86.4 135.89,87.63 135.89,93.98 134.465,95.405
  Bottom Layer w0.2: v1(73.914,128.016) 65.532,128.016 v1(64.516,127) 64.516,119.126 62.23,116.84 62.23,112.598 61.087,111.455 61.087,97.663 59.944,96.52 55.88,96.52 J6.2 54.61,93.345 56.566,91.389 75.641,91.389 79.858,95.606 87.782,95.606 89.611,97.434 v1(89.611,106.147)
pads on no net: J1.7 J1.8 J1.9 J1.10 J1.15 J1.16 J6.3 J8.4 U1.9 U1.10 U1.11 U1.19 U1.22 U4.0 U4.10 U4.13 U4.14 U4.15 U4.16 U4.17 U4.18 U4.19 U4.20 U4.21 U4.22 U4.29

## Polygon pours and split planes (outlines as drawn)
GND on Top Layer "Top Layer-No Net" (solid, pour order 6): 137.795,136.195 137.795,76.2 50.8,76.2 50.8,136.195
GND on Bottom Layer "Top Layer-No Net" (solid, pour order 8): 50.8,136.195 50.8,76.2 137.795,76.2 137.795,136.195